# Altium PCB Motherboard.PcbDoc
Units mil, origin at the board's own origin, x right, y up, seen from the top; angles counter-clockwise.
Board outline 6000 x 4000 mil, 2 copper layers (Top Layer, Bottom Layer); 119 components, 87 nets, 357 pads, 0 vias.
Unrouted connection lines stored in the file: 264.
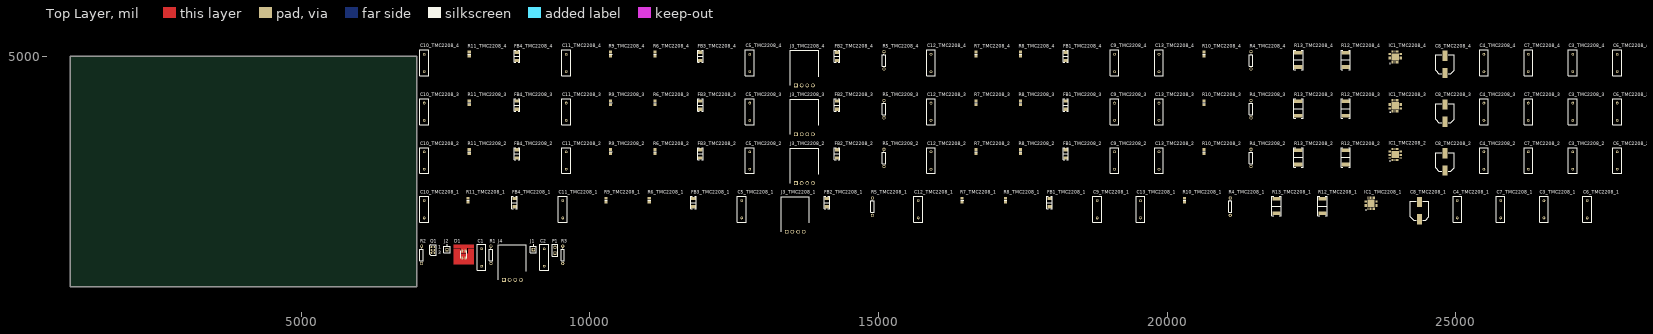
[diagram p0: Top Layer view]
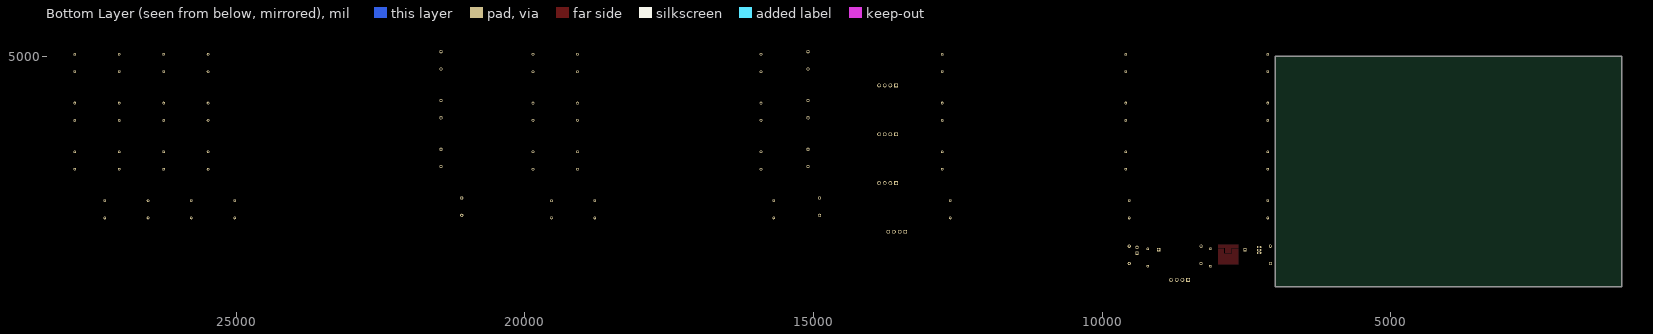
[diagram p1: Bottom Layer view, seen from below]

## Layer stack, top to bottom
Top Solder: solder mask 0.4, Solder Resist, Dk 3.5
Top Layer: signal copper 1.4
Dielectric 1: dielectric 12.6, FR-4, Dk 4.8
Bottom Layer: signal copper 1.4
Bottom Solder: solder mask 0.4, Solder Resist, Dk 3.5

## Board outline
1000,1000 7000,1000 7000,5000 1000,5000

## Design rules (kind name [scope] priority, off if disabled: settings)
Clearance [All] p1: gap=10 ignorepadtopadclearanceinfootprint=FALSE except(0: Arc-Hole Track-Hole SMDPad-Hole THPad-Hole Via-Hole Fill-Hole Poly-Hole Region-Hole Text-Hole)
PolygonConnect [All] p1: connectstyle=Relief reliefconductorwidth=10 reliefentries=4 polygonreliefangle="90 Angle" airgapwidth=10
RoomDefinition TMC2208_4 [InComponentClass('TMC2208_4')] p1: confinementstyle=ConfineIn formatcopy=TRUE lockcomponents=FALSE outline 7045,4430 28450,4430 28450,5225 7045,5225
RoomDefinition TMC2208_3 [InComponentClass('TMC2208_3')] p2: confinementstyle=ConfineIn formatcopy=TRUE lockcomponents=FALSE outline 7045,3585 28450,3585 28450,4380 7045,4380
RoomDefinition TMC2208_2 [InComponentClass('TMC2208_2')] p3: confinementstyle=ConfineIn formatcopy=TRUE lockcomponents=FALSE outline 7045,2740 28450,2740 28450,3535 7045,3535
RoomDefinition TMC2208_1 [InComponentClass('TMC2208_1')] p4: confinementstyle=ConfineIn formatcopy=TRUE lockcomponents=FALSE outline 7045,1895 27910,1895 27910,2690 7045,2690
RoomDefinition Motherboard [InComponentClass('Motherboard')] p5: confinementstyle=ConfineIn formatcopy=TRUE lockcomponents=FALSE outline 7045,1060 9625,1060 9625,1845 7045,1845
RoutingVias [All] p1: holewidth=28 width=50 viastyle="Through Hole" minholewidth=28 minwidth=50 maxholewidth=28 maxwidth=50
SolderMaskExpansion [All] p1: expansion=4 istentingtop=FALSE
Width [All] p1: maxlimit=10 minlimit=10 preferedwidth=10
30 further rules are at their usual default settings.

## Classes and differential pairs
channel class TMC2208: TMC2208_1 TMC2208_2 TMC2208_3 TMC2208_4
component class TMC2208_4: C3_TMC2208_4 C4_TMC2208_4 C5_TMC2208_4 C6_TMC2208_4 C7_TMC2208_4 C8_TMC2208_4 C9_TMC2208_4 C10_TMC2208_4 C11_TMC2208_4 C12_TMC2208_4 C13_TMC2208_4 FB1_TMC2208_4 FB2_TMC2208_4 FB3_TMC2208_4 FB4_TMC2208_4 IC1_TMC2208_4 J3_TMC2208_4 R4_TMC2208_4 R5_TMC2208_4 R6_TMC2208_4 R7_TMC2208_4 R8_TMC2208_4 R9_TMC2208_4 R10_TMC2208_4 R11_TMC2208_4 R12_TMC2208_4 R13_TMC2208_4
component class TMC2208_3: C3_TMC2208_3 C4_TMC2208_3 C5_TMC2208_3 C6_TMC2208_3 C7_TMC2208_3 C8_TMC2208_3 C9_TMC2208_3 C10_TMC2208_3 C11_TMC2208_3 C12_TMC2208_3 C13_TMC2208_3 FB1_TMC2208_3 FB2_TMC2208_3 FB3_TMC2208_3 FB4_TMC2208_3 IC1_TMC2208_3 J3_TMC2208_3 R4_TMC2208_3 R5_TMC2208_3 R6_TMC2208_3 R7_TMC2208_3 R8_TMC2208_3 R9_TMC2208_3 R10_TMC2208_3 R11_TMC2208_3 R12_TMC2208_3 R13_TMC2208_3
component class TMC2208_2: C3_TMC2208_2 C4_TMC2208_2 C5_TMC2208_2 C6_TMC2208_2 C7_TMC2208_2 C8_TMC2208_2 C9_TMC2208_2 C10_TMC2208_2 C11_TMC2208_2 C12_TMC2208_2 C13_TMC2208_2 FB1_TMC2208_2 FB2_TMC2208_2 FB3_TMC2208_2 FB4_TMC2208_2 IC1_TMC2208_2 J3_TMC2208_2 R4_TMC2208_2 R5_TMC2208_2 R6_TMC2208_2 R7_TMC2208_2 R8_TMC2208_2 R9_TMC2208_2 R10_TMC2208_2 R11_TMC2208_2 R12_TMC2208_2 R13_TMC2208_2
component class TMC2208_1: C3_TMC2208_1 C4_TMC2208_1 C5_TMC2208_1 C6_TMC2208_1 C7_TMC2208_1 C8_TMC2208_1 C9_TMC2208_1 C10_TMC2208_1 C11_TMC2208_1 C12_TMC2208_1 C13_TMC2208_1 FB1_TMC2208_1 FB2_TMC2208_1 FB3_TMC2208_1 FB4_TMC2208_1 IC1_TMC2208_1 J3_TMC2208_1 R4_TMC2208_1 R5_TMC2208_1 R6_TMC2208_1 R7_TMC2208_1 R8_TMC2208_1 R9_TMC2208_1 R10_TMC2208_1 R11_TMC2208_1 R12_TMC2208_1 R13_TMC2208_1
component class Motherboard: C1 C2 D1 J1 J2 J4 P1 Q1 R1 R2 R3

## Components (designator, comment, footprint, x,y, rotation, side; value= is the part's Value field where it differs from the comment)
C1 "Cap" RAD-0.3 8125,1510 r90 top value=100uF
C2 "Cap" RAD-0.3 9210,1510 r90 top value=4u7
C3_TMC2208_1 "Cap" RAD-0.3 26530,2345 r90 top value=22n (schematic designator C3)
C3_TMC2208_2 "Cap" RAD-0.3 27030,3190 r90 top value=22n (schematic designator C3)
C3_TMC2208_3 "Cap" RAD-0.3 27030,4035 r90 top value=22n (schematic designator C3)
C3_TMC2208_4 "Cap" RAD-0.3 27030,4880 r90 top value=22n (schematic designator C3)
C4_TMC2208_1 "Cap" RAD-0.3 25030,2345 r90 top value=100n (schematic designator C4)
C4_TMC2208_2 "Cap" RAD-0.3 25490,3190 r90 top value=100n (schematic designator C4)
C4_TMC2208_3 "Cap" RAD-0.3 25490,4035 r90 top value=100n (schematic designator C4)
C4_TMC2208_4 "Cap" RAD-0.3 25490,4880 r90 top value=100n (schematic designator C4)
C5_TMC2208_1 "Cap" RAD-0.3 12630,2345 r90 top value=3.3u (schematic designator C5)
C5_TMC2208_2 "Cap" RAD-0.3 12770,3190 r90 top value=3.3u (schematic designator C5)
C5_TMC2208_3 "Cap" RAD-0.3 12770,4035 r90 top value=3.3u (schematic designator C5)
C5_TMC2208_4 "Cap" RAD-0.3 12770,4880 r90 top value=3.3u (schematic designator C5)
C6_TMC2208_1 "Cap" RAD-0.3 27280,2345 r90 top value=100n (schematic designator C6)
C6_TMC2208_2 "Cap" RAD-0.3 27800,3190 r90 top value=100n (schematic designator C6)
C6_TMC2208_3 "Cap" RAD-0.3 27800,4035 r90 top value=100n (schematic designator C6)
C6_TMC2208_4 "Cap" RAD-0.3 27800,4880 r90 top value=100n (schematic designator C6)
C7_TMC2208_1 "Cap" RAD-0.3 25780,2345 r90 top value=100n (schematic designator C7)
C7_TMC2208_2 "Cap" RAD-0.3 26260,3190 r90 top value=100n (schematic designator C7)
C7_TMC2208_3 "Cap" RAD-0.3 26260,4035 r90 top value=100n (schematic designator C7)
C7_TMC2208_4 "Cap" RAD-0.3 26260,4880 r90 top value=100n (schematic designator C7)
C8_TMC2208_1 "100µF" "CAP ALSMD 8.3MM H10.5MM" 24375,2320 r90 top (schematic designator C8)
C8_TMC2208_2 "100µF" "CAP ALSMD 8.3MM H10.5MM" 24815,3165 r90 top (schematic designator C8)
C8_TMC2208_3 "100µF" "CAP ALSMD 8.3MM H10.5MM" 24815,4010 r90 top (schematic designator C8)
C8_TMC2208_4 "100µF" "CAP ALSMD 8.3MM H10.5MM" 24815,4855 r90 top (schematic designator C8)
C9_TMC2208_1 "Cap" RAD-0.3 18790,2345 r90 top value=100n (schematic designator C9)
C9_TMC2208_2 "Cap" RAD-0.3 19090,3190 r90 top value=100n (schematic designator C9)
C9_TMC2208_3 "Cap" RAD-0.3 19090,4035 r90 top value=100n (schematic designator C9)
C9_TMC2208_4 "Cap" RAD-0.3 19090,4880 r90 top value=100n (schematic designator C9)
C10_TMC2208_1 "Cap" RAD-0.3 7130,2345 r90 top value=470p (schematic designator C10)
C10_TMC2208_2 "Cap" RAD-0.3 7130,3190 r90 top value=470p (schematic designator C10)
C10_TMC2208_3 "Cap" RAD-0.3 7130,4035 r90 top value=470p (schematic designator C10)
C10_TMC2208_4 "Cap" RAD-0.3 7130,4880 r90 top value=470p (schematic designator C10)
C11_TMC2208_1 "Cap" RAD-0.3 9530,2345 r90 top value=470p (schematic designator C11)
C11_TMC2208_2 "Cap" RAD-0.3 9590,3190 r90 top value=470p (schematic designator C11)
C11_TMC2208_3 "Cap" RAD-0.3 9590,4035 r90 top value=470p (schematic designator C11)
C11_TMC2208_4 "Cap" RAD-0.3 9590,4880 r90 top value=470p (schematic designator C11)
C12_TMC2208_1 "Cap" RAD-0.3 15690,2345 r90 top value=470p (schematic designator C12)
C12_TMC2208_2 "Cap" RAD-0.3 15910,3190 r90 top value=470p (schematic designator C12)
C12_TMC2208_3 "Cap" RAD-0.3 15910,4035 r90 top value=470p (schematic designator C12)
C12_TMC2208_4 "Cap" RAD-0.3 15910,4880 r90 top value=470p (schematic designator C12)
C13_TMC2208_1 "Cap" RAD-0.3 19540,2345 r90 top value=470p (schematic designator C13)
C13_TMC2208_2 "Cap" RAD-0.3 19860,3190 r90 top value=470p (schematic designator C13)
C13_TMC2208_3 "Cap" RAD-0.3 19860,4035 r90 top value=470p (schematic designator C13)
C13_TMC2208_4 "Cap" RAD-0.3 19860,4880 r90 top value=470p (schematic designator C13)
D1 "RED" "Broadcom 4-PLLC 3228" 7815,1560 r0 top
FB1_TMC2208_1 "50 Ohms @ 100 MHz" "FER 1206_3216" 17965,2460 r90 top (schematic designator FB1)
FB1_TMC2208_2 "50 Ohms @ 100 MHz" "FER 1206_3216" 18245,3305 r90 top (schematic designator FB1)
FB1_TMC2208_3 "50 Ohms @ 100 MHz" "FER 1206_3216" 18245,4150 r90 top (schematic designator FB1)
FB1_TMC2208_4 "50 Ohms @ 100 MHz" "FER 1206_3216" 18245,4995 r90 top (schematic designator FB1)
FB2_TMC2208_1 "50 Ohms @ 100 MHz" "FER 1206_3216" 14105,2460 r90 top (schematic designator FB2)
FB2_TMC2208_2 "50 Ohms @ 100 MHz" "FER 1206_3216" 14285,3305 r90 top (schematic designator FB2)
FB2_TMC2208_3 "50 Ohms @ 100 MHz" "FER 1206_3216" 14285,4150 r90 top (schematic designator FB2)
FB2_TMC2208_4 "50 Ohms @ 100 MHz" "FER 1206_3216" 14285,4995 r90 top (schematic designator FB2)
FB3_TMC2208_1 "50 Ohms @ 100 MHz" "FER 1206_3216" 11795,2460 r90 top (schematic designator FB3)
FB3_TMC2208_2 "50 Ohms @ 100 MHz" "FER 1206_3216" 11915,3305 r90 top (schematic designator FB3)
FB3_TMC2208_3 "50 Ohms @ 100 MHz" "FER 1206_3216" 11915,4150 r90 top (schematic designator FB3)
FB3_TMC2208_4 "50 Ohms @ 100 MHz" "FER 1206_3216" 11915,4995 r90 top (schematic designator FB3)
FB4_TMC2208_1 "50 Ohms @ 100 MHz" "FER 1206_3216" 8695,2460 r90 top (schematic designator FB4)
FB4_TMC2208_2 "50 Ohms @ 100 MHz" "FER 1206_3216" 8735,3305 r90 top (schematic designator FB4)
FB4_TMC2208_3 "50 Ohms @ 100 MHz" "FER 1206_3216" 8735,4150 r90 top (schematic designator FB4)
FB4_TMC2208_4 "50 Ohms @ 100 MHz" "FER 1206_3216" 8735,4995 r90 top (schematic designator FB4)
IC1_TMC2208_1 "TMC2208-LA-T" QFN50P500X500X90-29N-D 23535,2450 r90 top (schematic designator IC1)
IC1_TMC2208_2 "TMC2208-LA-T" QFN50P500X500X90-29N-D 23955,3295 r90 top (schematic designator IC1)
IC1_TMC2208_3 "TMC2208-LA-T" QFN50P500X500X90-29N-D 23955,4140 r90 top (schematic designator IC1)
IC1_TMC2208_4 "TMC2208-LA-T" QFN50P500X500X90-29N-D 23955,4985 r90 top (schematic designator IC1)
J1 "Hot Bed +" PIN1 9020,1645 r0 top
J2 "Hot Bed -" PIN1 7525,1645 r0 top
J3_TMC2208_1 "S4B-XH-A_LF__SN_" SHDRRA4W64P0X250_1X4_1240X1150X700P 13410,1955 r0 top (schematic designator J3)
J3_TMC2208_2 "S4B-XH-A_LF__SN_" SHDRRA4W64P0X250_1X4_1240X1150X700P 13570,2800 r0 top (schematic designator J3)
J3_TMC2208_3 "S4B-XH-A_LF__SN_" SHDRRA4W64P0X250_1X4_1240X1150X700P 13570,3645 r0 top (schematic designator J3)
J3_TMC2208_4 "S4B-XH-A_LF__SN_" SHDRRA4W64P0X250_1X4_1240X1150X700P 13570,4490 r0 top (schematic designator J3)
J4 "S4B-XH-A_LF__SN_" SHDRRA4W64P0X250_1X4_1240X1150X700P 8510,1120 r0 top
P1 "JST-XH-02" HDR1X2 9395,1585 r90 top
Q1 "HA210N06" E3 7280,1640 r0 top
R1 "Res1" AXIAL-0.3 8285,1555 r90 top value=10k
R2 "Res1" AXIAL-0.3 7085,1555 r90 top value=10k
R3 "Res1" AXIAL-0.3 9530,1555 r90 top value=4k7
R4_TMC2208_1 "Res1" AXIAL-0.3 21095,2390 r90 top value=100k (schematic designator R4)
R4_TMC2208_2 "Res1" AXIAL-0.3 21455,3235 r90 top value=100k (schematic designator R4)
R4_TMC2208_3 "Res1" AXIAL-0.3 21455,4080 r90 top value=100k (schematic designator R4)
R4_TMC2208_4 "Res1" AXIAL-0.3 21455,4925 r90 top value=100k (schematic designator R4)
R5_TMC2208_1 "Res1" AXIAL-0.3 14895,2390 r90 top value=22k (schematic designator R5)
R5_TMC2208_2 "Res1" AXIAL-0.3 15095,3235 r90 top value=22k (schematic designator R5)
R5_TMC2208_3 "Res1" AXIAL-0.3 15095,4080 r90 top value=22k (schematic designator R5)
R5_TMC2208_4 "Res1" AXIAL-0.3 15095,4925 r90 top value=22k (schematic designator R5)
R6_TMC2208_1 "Res Varistor" 6-0805_N 11030,2500 r90 top (schematic designator R6)
R6_TMC2208_2 "Res Varistor" 6-0805_N 11130,3345 r90 top (schematic designator R6)
R6_TMC2208_3 "Res Varistor" 6-0805_N 11130,4190 r90 top (schematic designator R6)
R6_TMC2208_4 "Res Varistor" 6-0805_N 11130,5035 r90 top (schematic designator R6)
R7_TMC2208_1 "Res Varistor" 6-0805_N 16450,2500 r90 top (schematic designator R7)
R7_TMC2208_2 "Res Varistor" 6-0805_N 16690,3345 r90 top (schematic designator R7)
R7_TMC2208_3 "Res Varistor" 6-0805_N 16690,4190 r90 top (schematic designator R7)
R7_TMC2208_4 "Res Varistor" 6-0805_N 16690,5035 r90 top (schematic designator R7)
R8_TMC2208_1 "Res Varistor" 6-0805_N 17200,2500 r90 top (schematic designator R8)
R8_TMC2208_2 "Res Varistor" 6-0805_N 17460,3345 r90 top (schematic designator R8)
R8_TMC2208_3 "Res Varistor" 6-0805_N 17460,4190 r90 top (schematic designator R8)
R8_TMC2208_4 "Res Varistor" 6-0805_N 17460,5035 r90 top (schematic designator R8)
R9_TMC2208_1 "Res Varistor" 6-0805_N 10280,2500 r90 top (schematic designator R9)
R9_TMC2208_2 "Res Varistor" 6-0805_N 10360,3345 r90 top (schematic designator R9)
R9_TMC2208_3 "Res Varistor" 6-0805_N 10360,4190 r90 top (schematic designator R9)
R9_TMC2208_4 "Res Varistor" 6-0805_N 10360,5035 r90 top (schematic designator R9)
R10_TMC2208_1 "Res Varistor" 6-0805_N 20300,2500 r90 top (schematic designator R10)
R10_TMC2208_2 "Res Varistor" 6-0805_N 20640,3345 r90 top (schematic designator R10)
R10_TMC2208_3 "Res Varistor" 6-0805_N 20640,4190 r90 top (schematic designator R10)
R10_TMC2208_4 "Res Varistor" 6-0805_N 20640,5035 r90 top (schematic designator R10)
R11_TMC2208_1 "Res Varistor" 6-0805_N 7890,2500 r90 top (schematic designator R11)
R11_TMC2208_2 "Res Varistor" 6-0805_N 7910,3345 r90 top (schematic designator R11)
R11_TMC2208_3 "Res Varistor" 6-0805_N 7910,4190 r90 top (schematic designator R11)
R11_TMC2208_4 "Res Varistor" 6-0805_N 7910,5035 r90 top (schematic designator R11)
R12_TMC2208_1 "270mR" "RES 2512_6432" 22695,2400 r90 top value="270 mOhms" (schematic designator R12)
R12_TMC2208_2 "270mR" "RES 2512_6432" 23095,3245 r90 top value="270 mOhms" (schematic designator R12)
R12_TMC2208_3 "270mR" "RES 2512_6432" 23095,4090 r90 top value="270 mOhms" (schematic designator R12)
R12_TMC2208_4 "270mR" "RES 2512_6432" 23095,4935 r90 top value="270 mOhms" (schematic designator R12)
R13_TMC2208_1 "270mR" "RES 2512_6432" 21895,2400 r90 top value="270 mOhms" (schematic designator R13)
R13_TMC2208_2 "270mR" "RES 2512_6432" 22275,3245 r90 top value="270 mOhms" (schematic designator R13)
R13_TMC2208_3 "270mR" "RES 2512_6432" 22275,4090 r90 top value="270 mOhms" (schematic designator R13)
R13_TMC2208_4 "270mR" "RES 2512_6432" 22275,4935 r90 top value="270 mOhms" (schematic designator R13)

## Footprints (in the part's own frame and the unit in brackets; to place one, negate y for a bottom-side part, rotate by r counter-clockwise, add the part's x,y. Pads: shape width x height; smd on the part's side, far side on the other; paste and mask are expansions set on the pad)
6-0805_N [mm] "Chip Resistor, Body 2.0x1.2mm, IPC Medium Density"
  rect 1.2x1.4 smd: 1(-0.9,0) 2(0.9,0)
  silkscreen extent 0,-0.6 0,0.6, body extent -1.07,-0.7 1.07,0.7, height 0.7
AXIAL-0.3 [mm] "Axial Device, Thru-Hole; 2 Leads; 0.3 in Pin Spacing"
  round 1.4 hole 0.85: 1(-3.81,0) 2(3.81,0)
  silkscreen extent -2.77,-0.76 2.77,0.76
"Broadcom 4-PLLC 3228" [mm] "SOJ, 6-Leads, Body 3.20x2.80mm, IPC Medium Density"
  rect 0.7x1.3 smd paste-0.05 mask+0.1: 1(-0.75,-1.55) 1(0.75,-1.55) 2(-0.75,1.55) 2(0.75,1.55)
  Top Layer region: -1.4,0.8 1.4,0.8 1.4,3 4.3,3 4.3,4.3 -4.3,4.3 -4.3,3 -1.4,3
  Top Layer region: -4.3,2.6 -1.8,2.6 -1.8,0.4 1.9,0.4 1.9,2.6 4.3,2.6 4.3,-4.3 -4.3,-4.3
  silkscreen extent -1.4,-1.6 1.4,1.6, body extent -1.4,-1.8 1.4,1.8, height 2.1
"CAP ALSMD 8.3MM H10.5MM" [mm] "Aluminum Electrolytic Capacitor, Body 8.30x8.30x10.50mm, IPC Low Density"
  rect 4.55x2.3 smd: 1(-3.8,0) 2(3.8,0)
  silkscreen extent -4.15,-4.15 4.15,4.15, body extent -4.95,-4.15 4.95,4.15, height 10.5
E3 [mm] "TO, Flat Index; 3 In-Line, Axial Leads; Body Dia. 4.6mm; Lead Dia. 0.5 mm (max)"
  oval 2x1 hole 0.8: 1(0,1.27) 2(0,0) 3(0,-1.27)
  silkscreen extent -1.41,-2.41 1.41,2.41
"FER 1206_3216" [mm] "Chip Ferrite, 2-Leads, Body 3.20x1.60mm, IPC Medium Density"
  rect 1.4x2 smd: 1(-1.8,0) 2(1.8,0)
  silkscreen extent -2.7,-1.2 2.7,1.2, body extent -1.65,-0.85 1.65,0.85, height 1.3
HDR1X2 [mm] "Connector; Header; 2 Position"
  rect 1.5x1.5 hole 0.9: 1(0,0)
  round 1.5 hole 0.9: 2(2.54,0)
  silkscreen extent -1.27,-1.27 3.81,1.27
PIN1 [mm] "Connector; Plug"
  rect 1.5x1.5 hole 0.9: 1(0,0)
  silkscreen extent -1.4,-1.4 1.4,2.17
QFN50P500X500X90-29N-D [mm]
  rect 1x0.3 smd: 1(-2.4,1.5) 2(-2.4,1) 3(-2.4,0.5) 4(-2.4,0) 5(-2.4,-0.5) 6(-2.4,-1) 7(-2.4,-1.5) 15(2.4,-1.5) 16(2.4,-1) 17(2.4,-0.5) 18(2.4,0) 19(2.4,0.5) 20(2.4,1) 21(2.4,1.5)
  rect 0.3x1 smd: 8(-1.5,-2.4) 9(-1,-2.4) 10(-0.5,-2.4) 11(0,-2.4) 12(0.5,-2.4) 13(1,-2.4) 14(1.5,-2.4) 22(1.5,2.4) 23(1,2.4) 24(0.5,2.4) 25(0,2.4) 26(-0.5,2.4) 27(-1,2.4) 28(-1.5,2.4)
  rect 3.2x3.2 smd: 29(0,0)
  silkscreen extent -3.02,2.12 -2.78,2.37, body extent -2.55,-2.55 2.55,2.55, height 0.9
RAD-0.3 [mm] "Radial Cap, Thru-Hole; 2 Leads; 0.3 in Pin Spacing"
  round 1.2 hole 0.7: 1(-3.81,0) 2(3.81,0)
  silkscreen extent -5.71,-1.91 5.71,1.91
"RES 2512_6432" [mm] "Chip Resistor, 2-Leads, Body 6.30x3.15mm, IPC Medium Density"
  rect 1.6x3.65 smd: 1(-3.175,0) 2(3.175,0)
  silkscreen extent -4.3,-2.05 4.3,2.05, body extent -3.15,-1.57 3.15,1.57, height 0.7
SHDRRA4W64P0X250_1X4_1240X1150X700P [mm]
  rect 1.65x1.65 hole 1.1: 1(0,0)
  round 1.65 hole 1.1: 2(2.5,0) 3(5,0) 4(7.5,0)
  silkscreen extent -2.45,0 9.95,15.4, body extent -2.45,-0.32 9.95,15.4, height 7

## Part data
C1 C2 C3_TMC2208_1 C3_TMC2208_2 C3_TMC2208_3 C3_TMC2208_4 C4_TMC2208_1 C4_TMC2208_2 C4_TMC2208_3 C4_TMC2208_4 C5_TMC2208_1 C5_TMC2208_2 C5_TMC2208_3 C5_TMC2208_4 C6_TMC2208_1 C6_TMC2208_2 C6_TMC2208_3 C6_TMC2208_4 C7_TMC2208_1 C7_TMC2208_2 C7_TMC2208_3 C7_TMC2208_4 C9_TMC2208_1 C9_TMC2208_2 C9_TMC2208_3 C9_TMC2208_4 C10_TMC2208_1 C10_TMC2208_2 C10_TMC2208_3 C10_TMC2208_4 C11_TMC2208_1 C11_TMC2208_2 C11_TMC2208_3 C11_TMC2208_4 C12_TMC2208_1 C12_TMC2208_2 C12_TMC2208_3 C12_TMC2208_4 C13_TMC2208_1 C13_TMC2208_2 C13_TMC2208_3 C13_TMC2208_4: "Capacitor", LatestRevisionDate=17-Jul-2002, LatestRevisionNote="Re-released for DXP Platform.", PackageDescription="Radial Cap, Thru-Hole; 2 Leads; 0.3 in Pin Spacing", PackageReference=RAD-0.3, Published=8-Jun-2000, Publisher="Altium Limited"
C8_TMC2208_1 C8_TMC2208_2 C8_TMC2208_3 C8_TMC2208_4: library part UUX1V101MNL6GS, "CAP ALUM 100UF 20% 35V SMD", Device Package="Radial, Can - SMD", Lifetime @ Temp.="2000 Hrs @ 105°C", manufacturer=Nichicon, Operating Temperature="-55°C ~ 105°C", Ripple Current @ High Frequency="367.9mA @ 10kHz", Ripple Current @ Low Frequency="283mA @ 120Hz", Supplier Part Number 1=493-6276-1-ND, Tolerance=±20%, Voltage - Rated=35V, Applications="General Purpose", Capacitance=100µF, componentlink1description=Datasheet, componentlink1url=http://nichicon-us.com/english/products/pdfs/e-uux.pdf, componentlink2description="DigiKey Link", componentlink2url=http://digikey.com/product-detail/en/nichicon/UUX1V101MNL6GS/493-6276-1-ND/3438789, Height - Seated (Max)="0.413\" (10.50mm)", lastupdated="02.09.2020 01:25:15", Lifecycle Status=Active, Minimum Order=1, Mounting Type="Surface Mount", Package / Case="Radial, Can - SMD", packaging=TapeAndReel, Part Number=UUX1V101MNL6GS, Part Status=Active, partid=7565, Polarization=Polar, price=0.19, series=UUX, Size / Dimension="0.315\" Dia (8.00mm)", Supplier 1=DigiKey, Surface Mount Land Size="0.327\" L x 0.327\" W (8.30mm x 8.30mm)"
D1: library part ASMT-QABD-AEF0E, "LED INDICATOR 0.5W AMBER 4PLCC", Color=Amber, Current - Max=300mA, Current - Test=150mA, Device Package=4-PLCC, Flux @ Current/Temperature - Test="16lm (12lm ~ 20lm)", Lumens/Watt @ Current - Test="46 lm/W", manufacturer="Broadcom Limited", Supplier Part Number 1=516-2949-1-ND, Temperature - Test=25°C, Voltage - Forward (Vf) (Typ)=2.3V, componentlink1description=Datasheet, componentlink1url=https://docs.broadcom.com/docs/AV02-1841EN, componentlink2description="DigiKey Link", componentlink2url=http://digikey.com/product-detail/en/broadcom-limited/ASMT-QABD-AEF0E/516-2949-1-ND/4240264, Height - Seated (Max)="0.083\" (2.10mm)", lastupdated="24.04.2020 00:55:47", Lifecycle Status=Active, Minimum Order=1, Mounting Type="Surface Mount", Package / Case=4-PLCC, packaging=TapeAndReel, Part Number=ASMT-QABD-AEF0E, Part Status=Active, price=0.42, series=-, Size / Dimension="0.126\" L x 0.110\" W (3.20mm x 2.80mm)", Supplier 1=DigiKey, Supplier Device Package=4-PLCC, Viewing Angle=120°, Wavelength="591nm (583nm ~ 598nm)"
FB1_TMC2208_1 FB1_TMC2208_2 FB1_TMC2208_3 FB1_TMC2208_4 FB2_TMC2208_1 FB2_TMC2208_2 FB2_TMC2208_3 FB2_TMC2208_4 FB3_TMC2208_1 FB3_TMC2208_2 FB3_TMC2208_3 FB3_TMC2208_4 FB4_TMC2208_1 FB4_TMC2208_2 FB4_TMC2208_3 FB4_TMC2208_4: library part ILHB1206ER500V, "FERRITE BEAD 50 OHM 1206 1LN", Current Rating (Max)=6A, DC Resistance (DCR) (Max)=20mOhm, Device Package="1206 (3216 Metric)", manufacturer="Vishay Dale", Operating Temperature="-55°C ~ 125°C", Supplier Part Number 1=541-2606-1-ND, componentlink1description=Datasheet, componentlink1url=http://www.vishay.com/docs/34102/ilhb.pdf, componentlink2description="DigiKey Link", componentlink2url=https://www.digikey.com/en/products/detail/vishay-dale/ILHB1206ER500V/2575024, Height (Max)="0.051\" (1.30mm)", Impedance @ Frequency="50 Ohms @ 100 MHz", lastupdated="31.07.2022 00:06:55", Lifecycle Status=Active, Minimum Order=1, Mounting Type="Surface Mount", Number of Lines=1, Package / Case="1206 (3216 Metric)", packaging=TapeAndReel, Part Number=ILHB1206ER500V, Part Status=Active, partid=1687, price=0.06, series=ILHB, Size / Dimension="0.126\" L x 0.063\" W (3.20mm x 1.60mm)", Supplier 1=DigiKey
IC1_TMC2208_1 IC1_TMC2208_2 IC1_TMC2208_3 IC1_TMC2208_4: "Integrated Circuit", Manufacturer_Name=TRINAMIC, Mouser Part Number=700-TMC2208-LA-T, Datasheet Link=https://datasheet.datasheetarchive.com/originals/distributors/DKDS-23/450911.pdf, Height=0.9mm, Manufacturer_Part_Number=TMC2208-LA-T, Mouser Price/Stock=https://www.mouser.co.uk/ProductDetail/Trinamic/TMC2208-LA-T?qs=TiOZkKH1s2TUCbyrI5xF3A%3D%3D
J1 J2: library part Socket, "Socket", LatestRevisionDate=17-Jul-2002, LatestRevisionNote="Re-released for DXP Platform.", Publisher="Altium Limited"
J3_TMC2208_1 J3_TMC2208_2 J3_TMC2208_3 J3_TMC2208_4 J4: "Connector", Arrow Part Number=S4B-XH-A(LF)(SN), Manufacturer_Name="JST (JAPAN SOLDERLESS TERMINALS)", Arrow Price/Stock=https://www.arrow.com/en/products/s4b-xh-a-lf-sn/jst-manufacturing, Datasheet Link=http://www.jst-mfg.com/product/pdf/eng/eXH.pdf, Height=7mm, Manufacturer_Part_Number=S4B-XH-A(LF)(SN)
P1: library part "Header 2", "Header, 2-Pin", LatestRevisionDate=17-Jul-2002, LatestRevisionNote="Re-released for DXP Platform.", Publisher="Altium Limited"
Q1: library part MOSFET-N, "N-Channel MOSFET", LatestRevisionDate=17-Jul-2002, LatestRevisionNote="Re-released for DXP Platform.", PackageDescription="TO, Flat Index; 3 In-Line, Axial Leads; Body Dia. 4.6mm; Lead Dia. 0.5 mm (max)", PackageReference=E3, PackageVersion=1995/1996, Published=8-Jun-2000, Publisher="Altium Limited"
R1 R2 R3 R4_TMC2208_1 R4_TMC2208_2 R4_TMC2208_3 R4_TMC2208_4 R5_TMC2208_1 R5_TMC2208_2 R5_TMC2208_3 R5_TMC2208_4: "Resistor", LatestRevisionDate=17-Jul-2002, LatestRevisionNote="Re-released for DXP Platform.", PackageDescription="Axial Device, Thru-Hole; 2 Leads; 0.3 in Pin Spacing", PackageReference=AXIAL-0.3, Published=8-Jun-2000, Publisher="Altium Limited"
R6_TMC2208_1 R6_TMC2208_2 R6_TMC2208_3 R6_TMC2208_4 R7_TMC2208_1 R7_TMC2208_2 R7_TMC2208_3 R7_TMC2208_4 R8_TMC2208_1 R8_TMC2208_2 R8_TMC2208_3 R8_TMC2208_4 R9_TMC2208_1 R9_TMC2208_2 R9_TMC2208_3 R9_TMC2208_4 R10_TMC2208_1 R10_TMC2208_2 R10_TMC2208_3 R10_TMC2208_4 R11_TMC2208_1 R11_TMC2208_2 R11_TMC2208_3 R11_TMC2208_4: "Varistor (Voltage-Sensitive Resistor)", Code_IPC=RESC2012, LatestRevisionDate=29-May-2009, LatestRevisionNote="IPC-7351 Footprint Added.", PackageDescription="Chip Resistor 0805 Case Size", PackageReference=6-0805, PackageVersion=Mar-2003, Published=24-Mar-1999, Publisher="Altium Limited"
R12_TMC2208_1 R12_TMC2208_2 R12_TMC2208_3 R12_TMC2208_4 R13_TMC2208_1 R13_TMC2208_2 R13_TMC2208_3 R13_TMC2208_4: library part RL73H3AR27FTDF, "RES 0.27 OHM 1% 1W 2512", Device Package="2512 (6432 Metric)", manufacturer="TE Connectivity Passive Product", Operating Temperature="-55°C ~ 155°C", Power (Watts)=1W, Resistance="270 mOhms", Supplier Device Package=2512, Supplier Part Number 1=A138622CT-ND, Temperature Coefficient=±100ppm/°C, Tolerance=±1%, componentlink1description=Datasheet, componentlink1url=https://www.te.com/commerce/DocumentDelivery/DDEController?Action=srchrtrv&DocNm=1773269&DocType=DS&DocLang=English, componentlink2description="DigiKey Link", componentlink2url=http://digikey.com/product-detail/en/te-connectivity-passive-product/RL73H3AR27FTDF/A138622CT-ND/9372023, Composition="Thick Film", Features="Current Sense", Height - Seated (Max)="0.028\" (0.70mm)", lastupdated="02.09.2020 01:26:50", Lifecycle Status=Active, Minimum Order=1, Number of Terminations=2, Package / Case="2512 (6432 Metric)", packaging=TapeAndReel, Part Number=RL73H3AR27FTDF, Part Status=Active, price=0.19, series="RL73, CGS", Size / Dimension="0.250\" L x 0.122\" W (6.35mm x 3.10mm)", Supplier 1=DigiKey

## Nets (pads, with @x,y where several pads share a name; then routed paths per layer and width w, separated by ;. In a path a pad name is that pad's centre, name@x,y a point inside that pad or via, vN(x,y) a via of type N, cw(c..) or ccw(c..) an arc to the next point about the centre after c; other vN are vias at no path point)
+3.3V_TMC2208_1: C9_TMC2208_1.1 C9_TMC2208_2.1 C9_TMC2208_3.1 C9_TMC2208_4.1 IC1_TMC2208_1.9 IC1_TMC2208_1.10 IC1_TMC2208_1.15 IC1_TMC2208_2.9 IC1_TMC2208_2.10 IC1_TMC2208_2.15 IC1_TMC2208_3.9 IC1_TMC2208_3.10 IC1_TMC2208_3.15 IC1_TMC2208_4.9 IC1_TMC2208_4.10 IC1_TMC2208_4.15 R3.2 R5_TMC2208_1.1 R5_TMC2208_2.1 R5_TMC2208_3.1 R5_TMC2208_4.1
BRA_TMC2208_1: IC1_TMC2208_1.23 R13_TMC2208_1.2
BRA_TMC2208_2: IC1_TMC2208_2.23 R13_TMC2208_2.2
BRA_TMC2208_3: IC1_TMC2208_3.23 R13_TMC2208_3.2
BRA_TMC2208_4: IC1_TMC2208_4.23 R13_TMC2208_4.2
BRB_TMC2208_1: IC1_TMC2208_1.27 R12_TMC2208_1.2
BRB_TMC2208_2: IC1_TMC2208_2.27 R12_TMC2208_2.2
BRB_TMC2208_3: IC1_TMC2208_3.27 R12_TMC2208_3.2
BRB_TMC2208_4: IC1_TMC2208_4.27 R12_TMC2208_4.2
CPI_TMC2208_1: C3_TMC2208_1.2 IC1_TMC2208_1.5
CPI_TMC2208_2: C3_TMC2208_2.2 IC1_TMC2208_2.5
CPI_TMC2208_3: C3_TMC2208_3.2 IC1_TMC2208_3.5
CPI_TMC2208_4: C3_TMC2208_4.2 IC1_TMC2208_4.5
CPO_TMC2208_1: C3_TMC2208_1.1 IC1_TMC2208_1.4
CPO_TMC2208_2: C3_TMC2208_2.1 IC1_TMC2208_2.4
CPO_TMC2208_3: C3_TMC2208_3.1 IC1_TMC2208_3.4
CPO_TMC2208_4: C3_TMC2208_4.1 IC1_TMC2208_4.4
GND_TMC2208_1: C1.1 C2.1 C5_TMC2208_1.2 C5_TMC2208_2.2 C5_TMC2208_3.2 C5_TMC2208_4.2 C6_TMC2208_1.2 C6_TMC2208_2.2 C6_TMC2208_3.2 C6_TMC2208_4.2 C7_TMC2208_1.2 C7_TMC2208_2.2 C7_TMC2208_3.2 C7_TMC2208_4.2 C8_TMC2208_1.2 C8_TMC2208_2.2 C8_TMC2208_3.2 C8_TMC2208_4.2 C9_TMC2208_1.2 C9_TMC2208_2.2 C9_TMC2208_3.2 C9_TMC2208_4.2 C10_TMC2208_1.1 C10_TMC2208_2.1 C10_TMC2208_3.1 C10_TMC2208_4.1 C11_TMC2208_1.1 C11_TMC2208_2.1 C11_TMC2208_3.1 C11_TMC2208_4.1 C12_TMC2208_1.2 C12_TMC2208_2.2 C12_TMC2208_3.2 C12_TMC2208_4.2 C13_TMC2208_1.2 C13_TMC2208_2.2 C13_TMC2208_3.2 C13_TMC2208_4.2 IC1_TMC2208_1.3 IC1_TMC2208_1.7 IC1_TMC2208_1.13 IC1_TMC2208_1.18 IC1_TMC2208_1.20 IC1_TMC2208_1.25 IC1_TMC2208_1.29 IC1_TMC2208_2.3 IC1_TMC2208_2.7 IC1_TMC2208_2.13 IC1_TMC2208_2.18 IC1_TMC2208_2.20 IC1_TMC2208_2.25 IC1_TMC2208_2.29 IC1_TMC2208_3.3 IC1_TMC2208_3.7 IC1_TMC2208_3.13 IC1_TMC2208_3.18 IC1_TMC2208_3.20 IC1_TMC2208_3.25 IC1_TMC2208_3.29 IC1_TMC2208_4.3 IC1_TMC2208_4.7 IC1_TMC2208_4.13 IC1_TMC2208_4.18 IC1_TMC2208_4.20 IC1_TMC2208_4.25 IC1_TMC2208_4.29 P1.2 Q1.3 R2.1 R4_TMC2208_1.1 R4_TMC2208_2.1 R4_TMC2208_3.1 R4_TMC2208_4.1 R8_TMC2208_1.2 R8_TMC2208_2.2 R8_TMC2208_3.2 R8_TMC2208_4.2 R9_TMC2208_1.1 R9_TMC2208_2.1 R9_TMC2208_3.1 R9_TMC2208_4.1 R10_TMC2208_1.2 R10_TMC2208_2.2 R10_TMC2208_3.2 R10_TMC2208_4.2 R11_TMC2208_1.2 R11_TMC2208_2.2 R11_TMC2208_3.2 R11_TMC2208_4.2 R12_TMC2208_1.1 R12_TMC2208_2.1 R12_TMC2208_3.1 R12_TMC2208_4.1 R13_TMC2208_1.1 R13_TMC2208_2.1 R13_TMC2208_3.1 R13_TMC2208_4.1
MA1_TMC2208_1: FB4_TMC2208_1.1 IC1_TMC2208_1.24
MA1_TMC2208_2: FB4_TMC2208_2.1 IC1_TMC2208_2.24
MA1_TMC2208_3: FB4_TMC2208_3.1 IC1_TMC2208_3.24
MA1_TMC2208_4: FB4_TMC2208_4.1 IC1_TMC2208_4.24
MA2_TMC2208_1: FB2_TMC2208_1.1 IC1_TMC2208_1.21
MA2_TMC2208_2: FB2_TMC2208_2.1 IC1_TMC2208_2.21
MA2_TMC2208_3: FB2_TMC2208_3.1 IC1_TMC2208_3.21
MA2_TMC2208_4: FB2_TMC2208_4.1 IC1_TMC2208_4.21
MB1_TMC2208_1: FB3_TMC2208_1.1 IC1_TMC2208_1.26
MB1_TMC2208_2: FB3_TMC2208_2.1 IC1_TMC2208_2.26
MB1_TMC2208_3: FB3_TMC2208_3.1 IC1_TMC2208_3.26
MB1_TMC2208_4: FB3_TMC2208_4.1 IC1_TMC2208_4.26
MB2_TMC2208_1: FB1_TMC2208_1.1 IC1_TMC2208_1.1
MB2_TMC2208_2: FB1_TMC2208_2.1 IC1_TMC2208_2.1
MB2_TMC2208_3: FB1_TMC2208_3.1 IC1_TMC2208_3.1
MB2_TMC2208_4: FB1_TMC2208_4.1 IC1_TMC2208_4.1
NetC2_2: C2.2 P1.1 R3.1
NetC5_TMC2208_1_1: C5_TMC2208_1.1 IC1_TMC2208_1.8
NetC5_TMC2208_2_1: C5_TMC2208_2.1 IC1_TMC2208_2.8
NetC5_TMC2208_3_1: C5_TMC2208_3.1 IC1_TMC2208_3.8
NetC5_TMC2208_4_1: C5_TMC2208_4.1 IC1_TMC2208_4.8
NetC10_TMC2208_1_2: C10_TMC2208_1.2 FB4_TMC2208_1.2 J3_TMC2208_1.4 R6_TMC2208_1.1 R11_TMC2208_1.1
NetC10_TMC2208_2_2: C10_TMC2208_2.2 FB4_TMC2208_2.2 J3_TMC2208_2.4 R6_TMC2208_2.1 R11_TMC2208_2.1
NetC10_TMC2208_3_2: C10_TMC2208_3.2 FB4_TMC2208_3.2 J3_TMC2208_3.4 R6_TMC2208_3.1 R11_TMC2208_3.1
NetC10_TMC2208_4_2: C10_TMC2208_4.2 FB4_TMC2208_4.2 J3_TMC2208_4.4 J4.4 R6_TMC2208_4.1 R11_TMC2208_4.1
NetC11_TMC2208_1_2: C11_TMC2208_1.2 FB3_TMC2208_1.2 J3_TMC2208_1.3 R6_TMC2208_1.2 R9_TMC2208_1.2
NetC11_TMC2208_2_2: C11_TMC2208_2.2 FB3_TMC2208_2.2 J3_TMC2208_2.3 R6_TMC2208_2.2 R9_TMC2208_2.2
NetC11_TMC2208_3_2: C11_TMC2208_3.2 FB3_TMC2208_3.2 J3_TMC2208_3.3 R6_TMC2208_3.2 R9_TMC2208_3.2
NetC11_TMC2208_4_2: C11_TMC2208_4.2 FB3_TMC2208_4.2 J3_TMC2208_4.3 J4.3 R6_TMC2208_4.2 R9_TMC2208_4.2
NetC12_TMC2208_1_1: C12_TMC2208_1.1 FB2_TMC2208_1.2 J3_TMC2208_1.2 R7_TMC2208_1.1 R8_TMC2208_1.1
NetC12_TMC2208_2_1: C12_TMC2208_2.1 FB2_TMC2208_2.2 J3_TMC2208_2.2 R7_TMC2208_2.1 R8_TMC2208_2.1
NetC12_TMC2208_3_1: C12_TMC2208_3.1 FB2_TMC2208_3.2 J3_TMC2208_3.2 R7_TMC2208_3.1 R8_TMC2208_3.1
NetC12_TMC2208_4_1: C12_TMC2208_4.1 FB2_TMC2208_4.2 J3_TMC2208_4.2 J4.2 R7_TMC2208_4.1 R8_TMC2208_4.1
NetC13_TMC2208_1_1: C13_TMC2208_1.1 FB1_TMC2208_1.2 J3_TMC2208_1.1 R7_TMC2208_1.2 R10_TMC2208_1.1
NetC13_TMC2208_2_1: C13_TMC2208_2.1 FB1_TMC2208_2.2 J3_TMC2208_2.1 R7_TMC2208_2.2 R10_TMC2208_2.1
NetC13_TMC2208_3_1: C13_TMC2208_3.1 FB1_TMC2208_3.2 J3_TMC2208_3.1 R7_TMC2208_3.2 R10_TMC2208_3.1
NetC13_TMC2208_4_1: C13_TMC2208_4.1 FB1_TMC2208_4.2 J3_TMC2208_4.1 J4.1 R7_TMC2208_4.2 R10_TMC2208_4.1
NetD1_1: D1.1 R1.1
NetD1_2: D1.2 J2.1 Q1.1
NetIC1_TMC2208_1_2: IC1_TMC2208_1.2 R4_TMC2208_1.2
NetIC1_TMC2208_1_11: IC1_TMC2208_1.11
NetIC1_TMC2208_1_12: IC1_TMC2208_1.12
NetIC1_TMC2208_1_14: IC1_TMC2208_1.14 R5_TMC2208_1.2
NetIC1_TMC2208_1_16: IC1_TMC2208_1.16
NetIC1_TMC2208_1_19: IC1_TMC2208_1.19
NetIC1_TMC2208_2_2: IC1_TMC2208_2.2 R4_TMC2208_2.2
NetIC1_TMC2208_2_11: IC1_TMC2208_2.11
NetIC1_TMC2208_2_12: IC1_TMC2208_2.12
NetIC1_TMC2208_2_14: IC1_TMC2208_2.14 R5_TMC2208_2.2
NetIC1_TMC2208_2_16: IC1_TMC2208_2.16
NetIC1_TMC2208_2_19: IC1_TMC2208_2.19
NetIC1_TMC2208_3_2: IC1_TMC2208_3.2 R4_TMC2208_3.2
NetIC1_TMC2208_3_11: IC1_TMC2208_3.11
NetIC1_TMC2208_3_12: IC1_TMC2208_3.12
NetIC1_TMC2208_3_14: IC1_TMC2208_3.14 R5_TMC2208_3.2
NetIC1_TMC2208_3_16: IC1_TMC2208_3.16
NetIC1_TMC2208_3_19: IC1_TMC2208_3.19
NetIC1_TMC2208_4_2: IC1_TMC2208_4.2 R4_TMC2208_4.2
NetIC1_TMC2208_4_11: IC1_TMC2208_4.11
NetIC1_TMC2208_4_12: IC1_TMC2208_4.12
NetIC1_TMC2208_4_14: IC1_TMC2208_4.14 R5_TMC2208_4.2
NetIC1_TMC2208_4_16: IC1_TMC2208_4.16
NetIC1_TMC2208_4_19: IC1_TMC2208_4.19
NetQ1_2: Q1.2 R2.2
VCP_TMC2208_1: C4_TMC2208_1.2 IC1_TMC2208_1.6
VCP_TMC2208_2: C4_TMC2208_2.2 IC1_TMC2208_2.6
VCP_TMC2208_3: C4_TMC2208_3.2 IC1_TMC2208_3.6
VCP_TMC2208_4: C4_TMC2208_4.2 IC1_TMC2208_4.6
VS_TMC2208_1: C1.2 C4_TMC2208_1.1 C4_TMC2208_2.1 C4_TMC2208_3.1 C4_TMC2208_4.1 C6_TMC2208_1.1 C6_TMC2208_2.1 C6_TMC2208_3.1 C6_TMC2208_4.1 C7_TMC2208_1.1 C7_TMC2208_2.1 C7_TMC2208_3.1 C7_TMC2208_4.1 C8_TMC2208_1.1 C8_TMC2208_2.1 C8_TMC2208_3.1 C8_TMC2208_4.1 IC1_TMC2208_1.22 IC1_TMC2208_1.28 IC1_TMC2208_2.22 IC1_TMC2208_2.28 IC1_TMC2208_3.22 IC1_TMC2208_3.28 IC1_TMC2208_4.22 IC1_TMC2208_4.28 J1.1 R1.2
pads on no net: IC1_TMC2208_1.17 IC1_TMC2208_2.17 IC1_TMC2208_3.17 IC1_TMC2208_4.17

## Text inside footprints (layer, text, board x,y; h text height)
Q1: Top Overlay "1" at 7369.57,1661.85 h59.05; Top Overlay "3" at 7369.57,1562.72 h59.05